# Allegro board MRHR_To_DAQ_Connect.brd
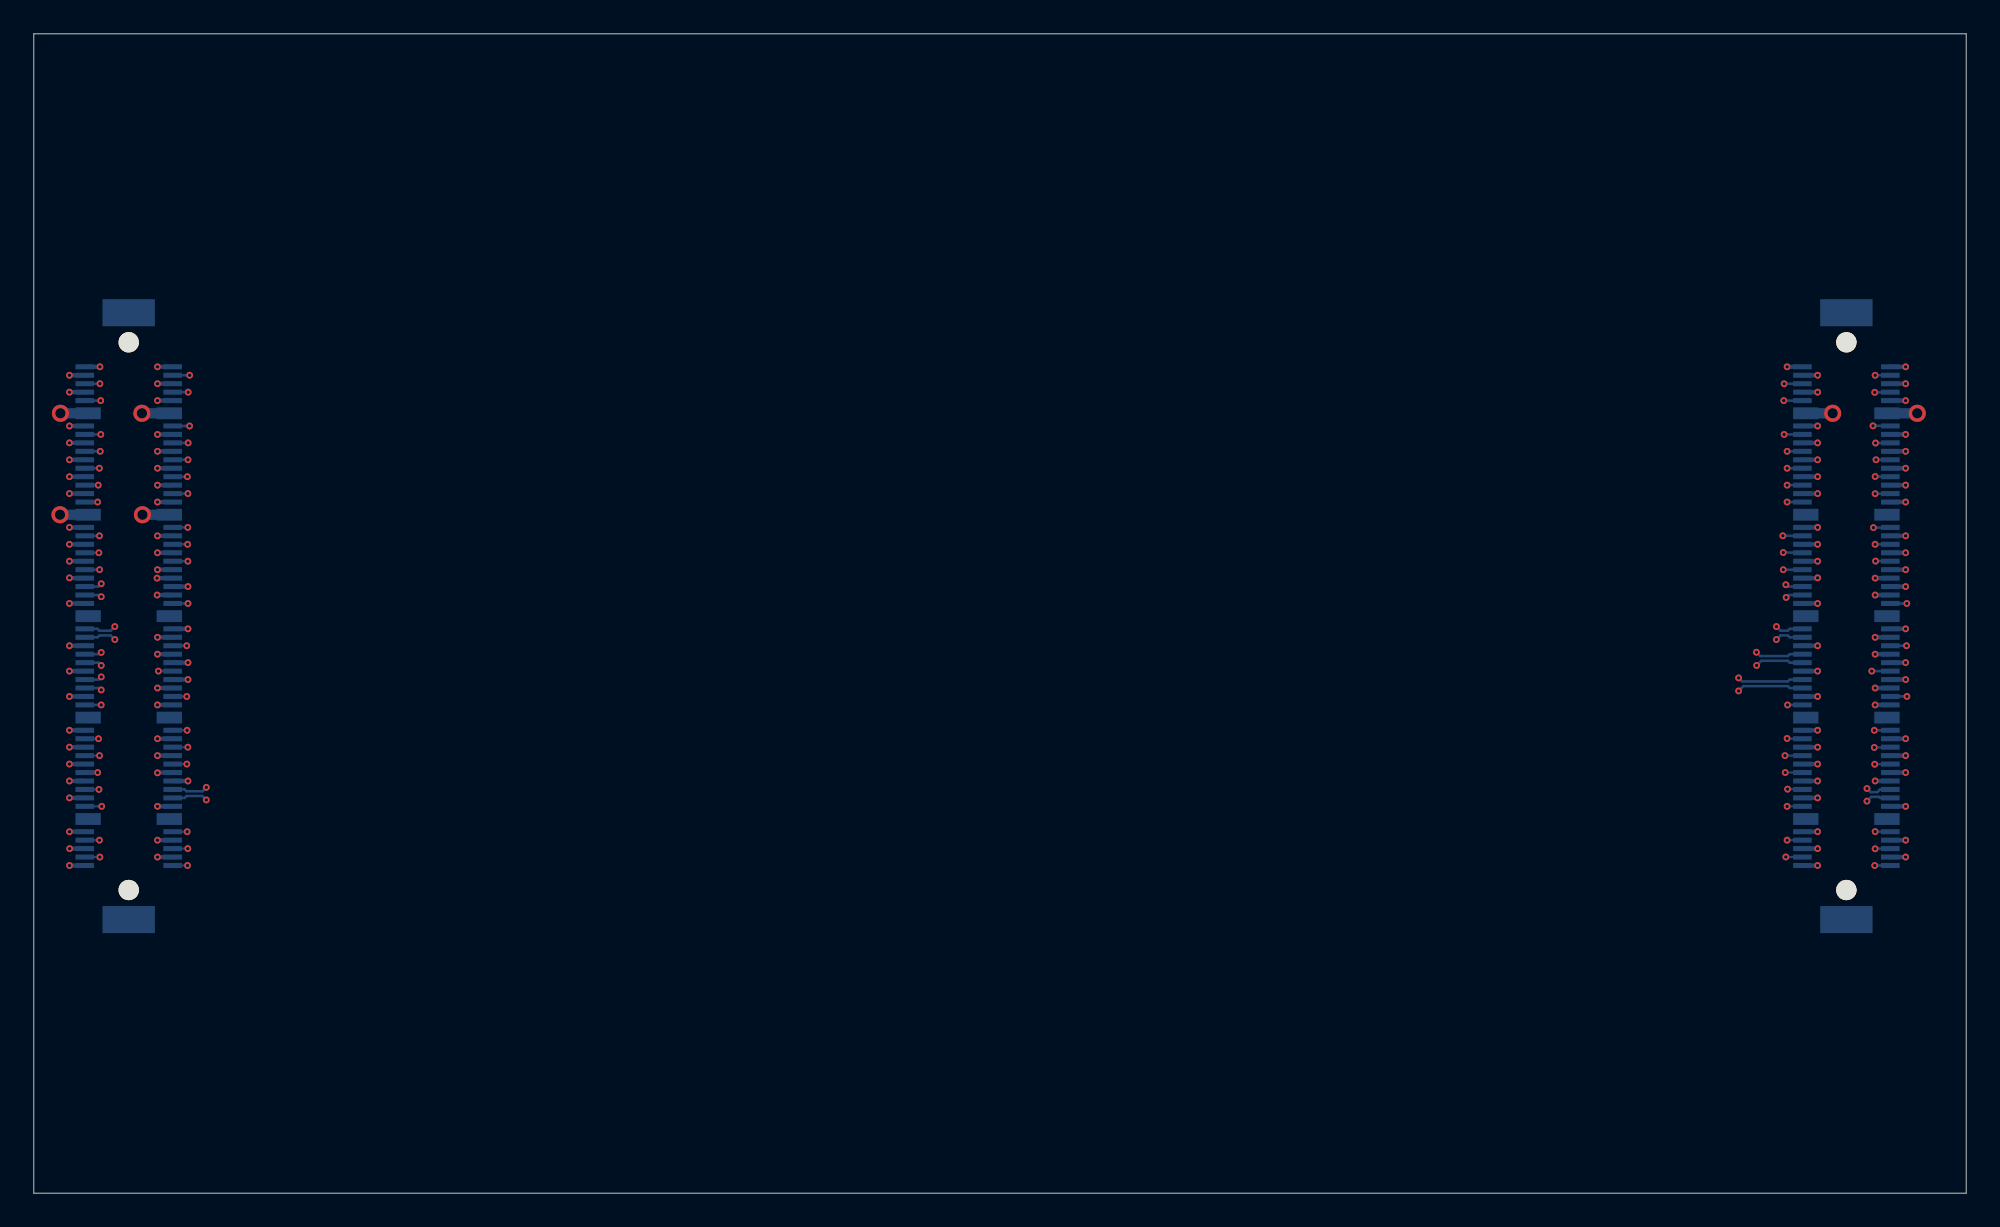
[diagram p0: board, top side]
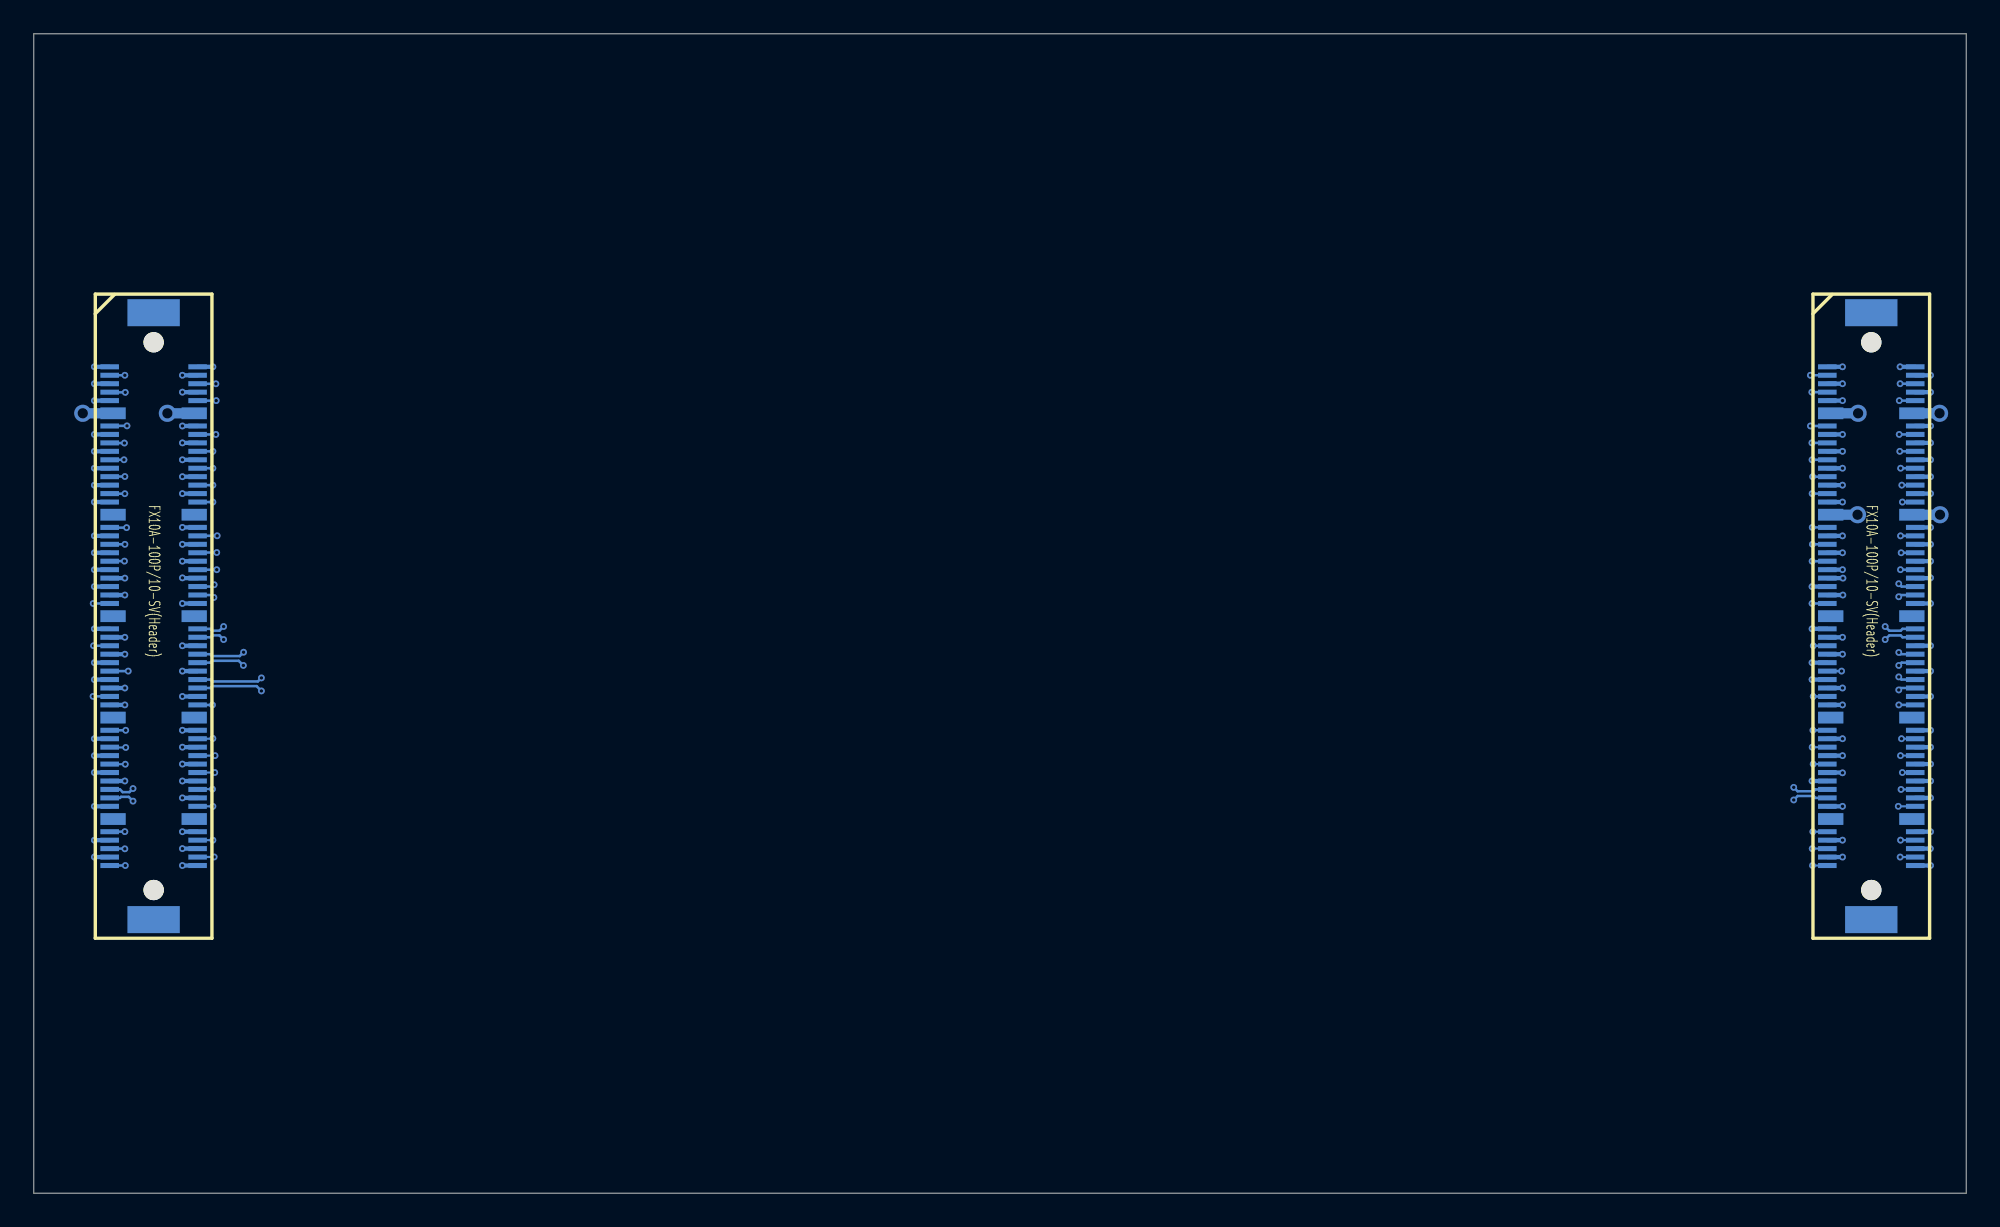
[diagram p1: board, bottom side, seen from below]

Outline 114.3 x 68.58 mm; copper layers: TOP, SIG1, SIG2, BOTTOM. Coordinates in mm from the lower left corner of the outline.
Outline path: 0,68.58 0,0 114.3,0 114.3,68.58 0,68.58

## Design rules (mm)
net group CK_5: nets CK_5N CK_5P
net group CK_40: nets CK_40N CK_40P
net group RAZ_CHN: nets RAZ_CHNN RAZ_CHNP
net group SPARE_DIFF: nets SPARE2 SPARE3
net group VAL_EVT: nets VAL_EVTN VAL_EVTP

## Placement (name value [footprint] x y rotation side)
U1  FX10A-100P_10-SV**(Header)  [FX10A-100P10-SV-HEADER]  8.76 52.88 270 bottom
U2  FX10A-100P_10-SV**(Header)  [FX10A-100P10-SV-HEADER]  110.36 52.88 270 bottom

## Library data of the parts
U1 U2 = FX10A_100P_10_SV_Header_1

## Footprints (pads in the part's own frame, mm; a bottom-side part is the same pattern mirrored in y, then rotated)
FX10A-100P10-SV-HEADER
  round 1.2 hole 1.2 unplated: (2.55,3.15) (34.95,3.15)
  rect 0.3x1.1 smd: 1(4,5.75) 2(4,0.55) 3(4.5,5.75) 4(4.5,0.55) 5(5,5.75) 6(5,0.55) 7(5.5,5.75) 8(5.5,0.55) 9(6,5.75) 10(6,0.55) 13(7.5,5.75) 14(7.5,0.55) 15(8,5.75) 16(8,0.55) 17(8.5,5.75) 18(8.5,0.55) 19(9,5.75) 20(9,0.55) 21(9.5,5.75) 22(9.5,0.55) 23(10,5.75) 24(10,0.55) 25(10.5,5.75) 26(10.5,0.55) 27(11,5.75) 28(11,0.55) 29(11.5,5.75) 30(11.5,0.55) 31(12,5.75) 32(12,0.55) 35(13.5,5.75) 36(13.5,0.55) 37(14,5.75) 38(14,0.55) 39(14.5,5.75) 40(14.5,0.55) 41(15,5.75) 42(15,0.55) 43(15.5,5.75) 44(15.5,0.55) 45(16,5.75) 46(16,0.55) 47(16.5,5.75) 48(16.5,0.55) 49(17,5.75) 50(17,0.55) 51(17.5,5.75) 52(17.5,0.55) 53(18,5.75) 54(18,0.55) 57(19.5,5.75) 58(19.5,0.55) 59(20,5.75) 60(20,0.55) 61(20.5,5.75) 62(20.5,0.55) 63(21,5.75) 64(21,0.55) 65(21.5,5.75) 66(21.5,0.55) 67(22,5.75) 68(22,0.55) 69(22.5,5.75) 70(22.5,0.55) 71(23,5.75) 72(23,0.55) 73(23.5,5.75) 74(23.5,0.55) 75(24,5.75) 76(24,0.55) 79(25.5,5.75) 80(25.5,0.55) 81(26,5.75) 82(26,0.55) 83(26.5,5.75) 84(26.5,0.55) 85(27,5.75) 86(27,0.55) 87(27.5,5.75) 88(27.5,0.55) 89(28,5.75) 90(28,0.55) 91(28.5,5.75) 92(28.5,0.55) 93(29,5.75) 94(29,0.55) 95(29.5,5.75) 96(29.5,0.55) 97(30,5.75) 98(30,0.55) 101(31.5,5.75) 102(31.5,0.55) 103(32,5.75) 104(32,0.55) 105(32.5,5.75) 106(32.5,0.55) 107(33,5.75) 108(33,0.55) 109(33.5,5.75) 110(33.5,0.55)
  rect 0.7x1.5 smd: 11(6.75,5.55) 12(6.75,0.75) 33(12.75,5.55) 34(12.75,0.75) 55(18.75,5.55) 56(18.75,0.75) 77(24.75,5.55) 78(24.75,0.75) 99(30.75,5.55) 100(30.75,0.75)
  rect 1.6x3.1 smd: B1(0.8,3.15) B2(36.7,3.15)

## Nets
GND: U1.2 U1.3 U1.6 U1.11(GND1) U1.12(GND1-1) U1.13 U1.16 U1.21 U1.24 U1.29 U1.32 U1.33(GND2) U1.34(GND2-2) U1.39 U1.42 U1.47 U1.50 U1.55(GND3) U1.56(GND3-3) U1.60 U1.61 U1.64 U1.70 U1.73 U1.76 U1.77(GND4) U1.78(GND4-4) U1.82 U1.83 U1.90 U1.91 U1.98 U1.99(GND5) U1.100(GND5-5) U1.101 U1.108 U1.109 U1.B1(PAD1) U1.B2(PAD2) U2.2 U2.3 U2.6 U2.11(GND1) U2.12(GND1-1) U2.13 U2.16 U2.21 U2.24 U2.29 U2.32 U2.33(GND2) U2.34(GND2-2) U2.39 U2.42 U2.47 U2.50 U2.55(GND3) U2.56(GND3-3) U2.60 U2.61 U2.64 U2.70 U2.73 U2.76 U2.77(GND4) U2.78(GND4-4) U2.82 U2.83 U2.90 U2.91 U2.98 U2.99(GND5) U2.100(GND5-5) U2.101 U2.108 U2.109 U2.B1(PAD1) U2.B2(PAD2)
VCC_CON_IN: U1.1 U1.7 U1.10 U1.17 U1.20 U1.25 U1.28 U1.35 U1.38 U1.43 U1.46 U1.48 U1.52 U1.53 U1.58 U1.66 U1.67 U1.72 U1.79 U1.86 U1.87 U1.92 U1.95 U1.104 U1.105 U2.1 U2.7 U2.10 U2.17 U2.20 U2.25 U2.28 U2.35 U2.38 U2.43 U2.46 U2.48 U2.52 U2.53 U2.58 U2.66 U2.67 U2.72 U2.79 U2.86 U2.87 U2.92 U2.95 U2.104 U2.105
A0: U1.14 U2.14
A1: U1.15 U2.15
CHIPSATB: U1.36 U2.36
CK_5N: U1.57 U2.57
CK_5P: U1.59 U2.59
CK_40N: U1.49 U2.49
CK_40P: U1.51 U2.51
DOUT1B: U1.44 U2.44
DOUT2B: U1.41 U2.41
END_READOUT1: U1.8 U2.8
END_READOUT2: U1.5 U2.5
HOLD: U1.18 U2.18
HOLDB: U1.88 U2.88
OUT_Q: U1.9 U2.9
OUT_TRIG0B: U1.81 U2.81
OUT_TRIG1B: U1.84 U2.84
OUT_TRIG2B: U1.85 U2.85
PWR_ON_A: U1.68 U2.68
PWR_ON_ADC: U1.74 U2.74
PWR_ON_D: U1.62 U2.62
PWR_ON_DAC: U1.75 U2.75
RAZ_CHNN: U1.63 U2.63
RAZ_CHNP: U1.65 U2.65
RESET_B: U1.45 U2.45
RST_COUNTERB: U1.31 U2.31
SELECT: U1.26 U2.26
SPARE0: U1.89 U2.89
SPARE1: U1.93 U2.93
SPARE2: U1.94 U2.94
SPARE3: U1.96 U2.96
SPARE4: U1.97 U2.97
SPARE5: U1.102 U2.102
SPARE6: U1.103 U2.103
SPARE7: U1.106 U2.106
SPARE8: U1.107 U2.107
SPARE9: U1.110 U2.110
SR_CK: U1.22 U2.22
SR_IN: U1.19 U2.19
SR_OUT: U1.4 U2.4
SR_RSTB: U1.23 U2.23
START_ACQ: U1.54 U2.54
START_READOUT1: U1.30 U2.30
START_READOUT2: U1.27 U2.27
TRANSMITON1B: U1.40 U2.40
TRANSMITON2B: U1.37 U2.37
TRIG_EXT: U1.80 U2.80
VAL_EVTN: U1.69 U2.69
VAL_EVTP: U1.71 U2.71

## Via types
v1: diameter 0.406, hole 0.203, TOP to BOTTOM, 200 vias
v2: diameter 1.016, hole 0.61, TOP to BOTTOM, 6 vias

## Routing (per net, layer and track width the routed paths; a pad name or vN(x,y) marks a point on that pad's centre or on a via; arc(x,y) is an arc through that point)
GND: length 58.6
  BOTTOM w0.254: U1.61 v1(2.11,32.38) ; U2.108 v1(110.72,19.88) ; U1.3 v1(2.11,48.38) ; U2.101 v1(105.51,21.38) ; U2.2 v1(110.72,48.88) ; U2.3 v1(105.51,48.38) ; U2.91 v1(105.51,24.38) ; U1.108 v1(7.32,19.88) ; U1.29 v1(2.11,41.38) ; U1.39 v1(2.11,38.38) ; U1.32 v1(7.32,40.88) ; v1(7.32,24.87) 7.33,24.88 U1.90 ; U1.70 v1(9.12,30.38) ; U2.13 v1(105.51,45.38) ; v1(105.51,36.4) 105.5,36.38 U2.47 ; U2.73 v1(105.51,29.38) ; U2.39 v1(105.51,38.38) ; v1(2.11,36.4) 2.12,36.38 U1.47 ; U1.50 v1(9.12,35.88) ; U1.60 v1(7.32,32.88) ; U1.2 v1(7.32,48.88) ; U2.50 v1(110.72,35.88) ; U2.83 v1(105.51,26.38) ; U2.21 v1(105.51,43.38) ; U2.61 v1(105.51,32.38) ; U1.98 v1(7.32,22.88) ; U2.32 v1(110.72,40.88) ; U2.29 v1(105.51,41.38) ; U1.73 v1(2.11,29.38) ; U2.60 v1(108.92,32.88) ; U2.76 v1(108.92,28.88) ; U2.64 v1(108.92,31.88) ; U1.16 v1(7.32,44.88) ; U1.83 v1(2.11,26.38) ; U2.6 v1(110.72,47.88) ; U2.70 v1(110.72,30.38) ; U1.64 v1(7.32,31.88) ; U1.76 v1(7.32,28.88) ; U2.98 v1(110.72,22.88) ; U1.6 v1(7.32,47.88) ; U2.90 v1(110.72,24.88) ; U1.101 v1(2.11,21.38) ; U2.42 v1(110.72,37.88) ; U2.16 v1(110.72,44.88) ; U1.21 v1(2.11,43.38) ; U2.82 v1(110.72,26.88) ; U1.82 v1(7.32,26.88) ; U1.109 v1(2.11,19.38) ; U1.91 v1(2.11,24.38) ; U2.109 v1(105.51,19.38) ; U1.13 v1(2.11,45.38) ; U1.24 v1(7.32,42.88) ; U2.24 v1(110.72,42.88) ; U1.42 v1(7.32,37.88)
  BOTTOM w0.61: U1.12 v2(6.39,46.13) ; U1.34 v2(6.43,40.13) ; U1.33 v2(1.55,40.13) ; U2.12 v2(111.4,46.13) ; U2.11 v2(106.4,46.13) ; U1.11 v2(1.57,46.13)
VCC_CON_IN: length 45.1
  BOTTOM w0.254: U2.28 v1(110.72,41.88) ; U2.72 v1(108.92,29.88) ; U1.79 v1(2.11,27.38) ; U2.35 v1(105.51,39.38) ; U2.20 v1(110.72,43.88) ; U1.28 v1(7.32,41.88) ; U1.38 v1(7.32,38.88) ; U1.53 v1(2.11,34.88) ; U1.48 v1(7.29,36.38) ; U1.52 v1(7.29,35.38) ; U2.86 v1(110.72,25.88) ; U1.25 v1(2.11,42.38) ; U1.87 v1(2.11,25.38) ; U2.1 v1(103.71,48.88) ; U1.35 v1(2.11,39.38) ; U1.46 v1(7.32,36.88) ; U2.7 v1(105.51,47.38) ; U2.79 v1(105.51,27.38) ; U1.1 v1(3.91,48.88) ; U2.92 v1(108.92,24.38) ; U1.7 v1(2.11,47.38) ; U1.20 v1(7.32,43.88) ; U1.92 v1(9.12,24.38) ; U1.66 v1(9.12,31.38) ; U2.58 v1(110.72,33.38) ; U2.66 v1(110.72,31.38) ; U2.43 v1(105.51,37.38) ; U1.86 v1(7.32,25.88) ; U2.52 v1(108.92,35.38) ; U1.58 v1(9.12,33.38) ; U2.87 v1(105.51,25.38) ; U2.48 v1(108.92,36.38) ; U2.53 v1(105.51,34.88) ; U1.67 v1(2.11,30.88) ; U2.95 v1(105.51,23.38) ; U1.105 v1(2.12,20.38) ; U1.10 v1(7.32,46.88) ; U2.46 v1(110.72,36.88) ; U2.105 v1(105.51,20.38) ; U1.72 v1(7.32,29.88) ; U2.10 v1(110.72,46.88) ; U1.17 v1(2.11,44.38) ; U2.25 v1(105.51,42.38) ; U1.95 v1(2.11,23.38) ; U2.67 v1(105.51,30.88) ; U2.17 v1(105.51,44.38) ; U2.104 v1(110.72,20.88) ; U1.104 v1(7.32,20.88) ; U2.38 v1(110.72,38.88) ; U1.43 v1(2.11,37.38)
A0: length 102
  SIG1 w0.152: v1(108.79,45.39) 108.31,44.91 105.08,44.91 104.6,45.38 v1(9.21,45.38)
  BOTTOM w0.152: v1(108.79,45.39) 109.81,45.39 U2.14 ; U1.14 v1(9.21,45.38)
A1: length 102
  SIG2 w0.152: v1(3.96,44.88) 4.47,45.39 7.93,45.39 8.43,44.88 v1(103.53,44.88)
  BOTTOM w0.152: U1.15 v1(3.96,44.88) ; v1(103.53,44.88) U2.15
CHIPSATB: length 102
  SIG1 w0.152: v1(9.11,39.38) 104.38,39.38 104.9,38.86 108.31,38.86 v1(108.81,39.37)
  BOTTOM w0.152: U2.36 109.8,39.37 v1(108.81,39.37) ; U1.36 v1(9.11,39.38)
CK_5N: length 102.8
  SIG2 w0.152: v1(4.79,33.52) 5.04,33.27 6.44,33.27 7.25,34.09 100.33,34.09 101.14,33.27 102.83,33.27 v1(103.07,33.52)
  BOTTOM w0.152: v1(103.07,33.52) 103.32,33.27 103.75,33.27 103.86,33.38 U2.57 ; v1(4.79,33.52) 4.55,33.27 3.87,33.27 3.76,33.38 U1.57
CK_5P: length 102.8
  SIG2 w0.152: v1(4.79,32.75) 5.04,32.99 6.55,32.99 7.37,33.81 100.21,33.81 101.03,32.99 102.83,32.99 v1(103.07,32.75)
  BOTTOM w0.152: v1(4.79,32.75) 4.55,32.99 3.87,32.99 3.76,32.88 U1.59 ; v1(103.07,32.75) 103.32,32.99 103.75,32.99 103.86,32.88 U2.59
CK_40N: length 103.1
  SIG1 w0.152: v1(103.63,35.99) 103.4,35.76 20.98,35.76 19.53,34.32 7.67,34.32 6.2,35.79 4.25,35.79 v1(3.99,36.05)
  BOTTOM w0.152: v1(3.99,36.05) 3.82,35.88 U1.49 ; U2.49 103.74,35.88 v1(103.63,35.99)
CK_40P: length 103.1
  SIG1 w0.152: v1(103.65,35.24) 103.4,35.48 21.1,35.48 19.65,34.04 7.56,34.04 6.08,35.51 4.22,35.51 v1(3.99,35.28)
  BOTTOM w0.152: U1.51 3.89,35.38 v1(3.99,35.28) ; v1(103.65,35.24) 103.79,35.38 U2.51
DOUT1B: length 102
  SIG1 w0.152: v1(108.94,37.39) 108.41,36.86 105.46,36.86 104.93,37.38 v1(9.11,37.38)
  BOTTOM w0.152: U1.44 v1(9.11,37.38) ; v1(108.94,37.39) 109.81,37.39 U2.44
DOUT2B: length 101.9
  SIG2 w0.152: v1(3.85,37.88) 4.25,38.29 8.35,38.29 8.74,37.9 v1(103.48,37.9)
  BOTTOM w0.152: U2.41 104.6,37.9 v1(103.48,37.9) ; U1.41 v1(3.85,37.88)
END_READOUT1: length 102
  SIG1 w0.152: v1(108.89,47.37) 108.43,47.83 105.18,47.83 104.74,47.38 v1(9.13,47.38)
  BOTTOM w0.152: U2.8 109.8,47.37 v1(108.89,47.37) ; U1.8 v1(9.13,47.38)
END_READOUT2: length 102.1
  SIG2 w0.152: v1(3.91,47.88) 4.46,48.44 8.23,48.44 8.79,47.88 v1(103.53,47.88)
  BOTTOM w0.152: U2.5 104.61,47.88 v1(103.53,47.88) ; U1.5 v1(3.91,47.88)
HOLD: length 102
  SIG1 w0.152: v1(108.94,44.37) 108.41,43.84 105,43.84 104.46,44.38 v1(9.13,44.38)
  BOTTOM w0.152: U1.18 v1(9.13,44.38) ; U2.18 109.8,44.37 v1(108.94,44.37)
HOLDB: length 102
  SIG1 w0.152: v1(9.05,25.38) 104.63,25.38 105.13,25.88 108.38,25.88 v1(108.89,25.37)
  BOTTOM w0.127: v1(108.89,25.37) 109.8,25.37 U2.88 ; U1.88 v1(9.05,25.38)
OUT_Q: length 102.7
  SIG1 w0.152: v1(103.51,46.88) 102.78,46.15 9.19,46.15 7.92,47.42 4.5,47.42 v1(3.96,46.88)
  BOTTOM w0.152: v1(103.51,46.88) U2.9 ; U1.9 v1(3.96,46.88)
OUT_TRIG0B: length 102
  SIG1 w0.152: v1(103.71,26.9) 8.46,26.9 7.98,27.38 4.32,27.38 v1(3.83,26.88)
  BOTTOM w0.127: U1.81 v1(3.83,26.88) ; U2.81 103.72,26.88 v1(103.71,26.9)
OUT_TRIG1B: length 102
  SIG1 w0.152: v1(108.86,26.37) 108.36,26.87 105,26.87 104.51,26.38 v1(9.11,26.38)
  BOTTOM w0.127: v1(108.86,26.37) 109.8,26.37 U2.84 ; U1.84 v1(9.11,26.38)
OUT_TRIG2B: length 102
  SIG1 w0.152: v1(103.58,25.88) 8.66,25.88 8.15,26.39 4.39,26.39 v1(3.89,25.88)
  BOTTOM w0.127: U1.85 v1(3.89,25.88) ; v1(103.58,25.88) U2.85
PWR_ON_A: length 103.8
  SIG2 w0.152: v1(7.37,30.88) 7.78,30.88 7.86,30.96 101.37,30.96 101.96,30.38 108.21,30.38 v1(108.72,30.88)
  BOTTOM w0.152: v1(108.72,30.88) U2.68 ; U1.68 v1(7.37,30.88)
PWR_ON_ADC: length 106.1
  SIG1 w0.152: v1(9.05,29.38) 10.41,29.38 13.49,32.46 102.18,32.46 102.67,31.98 105.34,31.98 106.93,30.38 109.8,30.38 v1(110.79,29.39)
  BOTTOM w0.152: v1(110.79,29.39) 109.82,29.39 U2.74 ; U1.74 v1(9.05,29.38)
PWR_ON_D: length 104.4
  SIG1 w0.152: v1(110.77,32.38) 108.38,32.38 107.98,32.79 104.72,32.79 104.27,32.33 102.96,32.33 102.95,32.34 102.9,32.34 102.3,32.94 9.61,32.94 v1(9.04,32.38)
  BOTTOM w0.152: U1.62 v1(9.04,32.38) ; v1(110.77,32.38) U2.62
PWR_ON_DAC: length 103.2
  SIG2 w0.152: v1(3.98,28.88) 4.72,28.88 5.92,27.69 7.14,27.69 7.9,26.92 101.78,26.92 v1(103.73,28.88)
  BOTTOM w0.152: U1.75 v1(3.98,28.88) ; U2.75 104.61,28.88 v1(103.73,28.88)
RAZ_CHNN: length 105.4
  SIG1 w0.152: v1(3.99,31.99) 4.23,31.74 4.89,31.74 5.79,30.84 5.79,29.77 7.19,28.37 87.92,28.37 91.25,31.7 101.59,31.7 v1(101.89,32)
  BOTTOM w0.152: v1(3.99,31.99) 3.88,31.88 U1.63 ; v1(101.89,32) 102.12,31.77 103.75,31.77 103.86,31.88 U2.63
RAZ_CHNP: length 105.4
  SIG1 w0.152: v1(101.9,31.22) 101.7,31.42 91.36,31.42 88.04,28.09 7.07,28.09 5.51,29.65 5.51,30.72 4.77,31.46 4.23,31.46 v1(3.99,31.22)
  BOTTOM w0.152: U2.65 103.86,31.38 103.75,31.49 102.18,31.49 v1(101.9,31.22) ; v1(3.99,31.22) 3.82,31.38 U1.65
RESET_B: length 102
  SIG1 w0.152: v1(103.48,36.88) 8.59,36.88 8.05,37.41 4.42,37.41 v1(3.89,36.88)
  BOTTOM w0.152: U2.45 104.61,36.88 v1(103.48,36.88) ; U1.45 v1(3.89,36.88)
RST_COUNTERB: length 102.2
  SIG2 w0.152: v1(103.71,40.88) 103.42,40.6 8.81,40.6 8.05,41.35 4.24,41.35 v1(3.77,40.88)
  BOTTOM w0.152: U1.31 v1(3.77,40.88) ; v1(103.71,40.88) U2.31
SELECT: length 102
  SIG1 w0.152: v1(108.92,42.39) 108.41,41.88 104.85,41.88 104.35,42.38 v1(9.08,42.38)
  BOTTOM w0.152: U1.26 v1(9.08,42.38) ; U2.26 109.8,42.39 v1(108.92,42.39)
SPARE0: length 102
  SIG1 w0.152: v1(3.78,24.88) 4.29,25.4 8.15,25.4 8.67,24.88 v1(103.6,24.88)
  BOTTOM w0.127: U1.89 v1(3.78,24.88) ; v1(103.6,24.88) U2.89
SPARE1: length 102.1
  SIG1 w0.152: v1(103.73,23.9) 36.42,23.9 35.89,24.43 9.8,24.43 9.25,23.88 v1(3.85,23.88)
  BOTTOM w0.127: U2.93 104.59,23.9 v1(103.73,23.9) ; U1.93 v1(3.85,23.88)
SPARE2: length 103.3
  SIG1 w0.152: v1(10.2,24) 10.38,23.83 33.06,23.83 34.58,22.3 105.22,22.3 106.67,23.75 108.16,23.75 108.35,23.94 v1(108.43,23.94)
  BOTTOM w0.152: U1.94 8.92,23.88 9.03,23.77 9.97,23.77 v1(10.2,24) ; U2.94 109.2,23.88 109.04,23.72 108.64,23.72 v1(108.43,23.94)
SPARE3: length 103.3
  SIG1 w0.152: v1(108.43,23.19) 108.37,23.19 108.1,23.47 106.79,23.47 105.34,22.02 34.46,22.02 32.94,23.55 10.49,23.55 v1(10.2,23.26)
  BOTTOM w0.152: v1(10.2,23.26) 9.97,23.5 9.03,23.5 8.92,23.38 U1.96 ; v1(108.43,23.19) 108.69,23.44 109.14,23.44 109.21,23.38 U2.96
SPARE4: length 103
  SIG2 w0.152: v1(103.71,22.88) 99.49,22.88 97.84,24.54 10.03,24.54 9.4,23.9 5.03,23.9 v1(4.02,22.88)
  BOTTOM w0.127: U1.97 v1(4.02,22.88) ; v1(103.71,22.88) U2.97
SPARE5: length 102
  SIG2 w0.152: v1(108.92,21.39) 108.46,20.93 104.77,20.93 104.32,21.38 v1(9.07,21.38)
  BOTTOM w0.127: U1.102 v1(9.07,21.38)
  BOTTOM w0.152: U2.102 109.81,21.39 v1(108.92,21.39)
SPARE6: length 102
  SIG1 w0.152: v1(3.88,20.88) 4.39,21.39 7.75,21.39 8.25,20.88 v1(103.71,20.88)
  BOTTOM w0.127: U1.103 v1(3.88,20.88) ; v1(103.71,20.88) U2.103
SPARE7: length 102
  SIG2 w0.152: v1(9.11,20.38) 104.51,20.38 105.03,19.86 108.41,19.86 v1(108.92,20.37)
  BOTTOM w0.127: U1.106 v1(9.11,20.38)
  BOTTOM w0.152: U2.106 108.93,20.38 v1(108.92,20.37)
SPARE8: length 102.1
  SIG1 w0.152: v1(3.91,19.88) 4.47,20.45 7.8,20.45 8.36,19.89 v1(103.63,19.89)
  BOTTOM w0.127: U1.107 v1(3.91,19.88) ; v1(103.63,19.89) 104.61,19.89 U2.107
SPARE9: length 102
  SIG2 w0.152: v1(9.09,19.38) 9.53,18.95 108.45,18.95 v1(108.89,19.38)
  BOTTOM w0.127: U1.110 v1(9.09,19.38)
  BOTTOM w0.152: v1(108.89,19.38) U2.110
SR_CK: length 102
  SIG1 w0.152: v1(108.97,43.38) 108.53,42.95 104.8,42.95 104.37,43.38 v1(9.12,43.38)
  BOTTOM w0.152: v1(108.97,43.38) 109.81,43.38 U2.22 ; U1.22 v1(9.12,43.38)
SR_IN: length 102
  SIG2 w0.152: v1(3.93,43.88) 4.42,44.37 8,44.37 8.49,43.88 v1(103.71,43.88)
  BOTTOM w0.152: v1(103.71,43.88) U2.19 ; U1.19 v1(3.93,43.88)
SR_OUT: length 102
  SIG1 w0.152: v1(9.22,48.38) 104.31,48.38 104.8,48.87 108.43,48.87 v1(108.92,48.38)
  BOTTOM w0.152: v1(108.92,48.38) U2.4 ; U1.4 v1(9.22,48.38)
SR_RSTB: length 102
  SIG2 w0.152: v1(103.71,42.88) 8.43,42.88 8,43.31 4.3,43.31 v1(3.88,42.88)
  BOTTOM w0.152: v1(103.71,42.88) U2.23 ; U1.23 v1(3.88,42.88)
START_ACQ: length 105
  SIG1 w0.152: v1(9.12,34.88) 10.65,34.88 12.24,36.47 104.65,36.47 105.99,35.13 108.59,35.13 108.75,34.98 109.08,34.98 109.28,35.17 110.5,35.17 v1(110.79,34.88)
  BOTTOM w0.152: v1(110.79,34.88) U2.54 ; U1.54 v1(9.12,34.88)
START_READOUT1: length 102
  SIG1 w0.152: v1(108.92,41.38) 108.46,40.92 104.67,40.92 104.21,41.38 v1(9.11,41.38)
  BOTTOM w0.152: U1.30 v1(9.11,41.38) ; U2.30 109.81,41.38 v1(108.92,41.38)
START_READOUT2: length 102
  SIG2 w0.152: v1(3.81,41.88) 4.27,42.34 8.1,42.34 8.56,41.88 v1(103.71,41.88)
  BOTTOM w0.152: U1.27 v1(3.81,41.88) ; v1(103.71,41.88) U2.27
TRANSMITON1B: length 102.1
  SIG1 w0.152: v1(108.91,38.38) 108.35,37.82 105.05,37.82 104.49,38.38 v1(9.1,38.38)
  BOTTOM w0.152: U1.40 v1(9.1,38.38) ; v1(108.91,38.38) U2.40
TRANSMITON2B: length 101.9
  SIG2 w0.152: v1(3.88,38.88) 4.29,39.29 8.62,39.29 9.03,38.89 v1(103.45,38.89)
  BOTTOM w0.152: U1.37 v1(3.88,38.88) ; v1(103.45,38.89) 104.61,38.89 U2.37
TRIG_EXT: length 102.2
  SIG1 w0.152: v1(9.07,27.38) 102.87,27.38 103.63,28.14 108.1,28.14 v1(108.86,27.38)
  BOTTOM w0.152: U2.80 109.81,27.38 v1(108.86,27.38) ; U1.80 v1(9.07,27.38)
VAL_EVTN: length 103.5
  SIG2 w0.152: v1(3.99,30.54) 4.22,30.3 5.24,30.3 6.1,29.44 6.12,29.44 7.14,28.42 15.28,28.42 17.08,30.23 100.58,30.23 v1(100.84,30.48)
  BOTTOM w0.152: U2.69 103.86,30.38 103.75,30.27 101.05,30.27 v1(100.84,30.48) ; U1.69 3.83,30.38 v1(3.99,30.54)
VAL_EVTP: length 103.5
  SIG2 w0.152: v1(100.84,29.71) 100.6,29.95 17.2,29.95 15.39,28.14 7.02,28.14 6.01,29.16 5.98,29.16 5.12,30.02 4.24,30.02 v1(3.99,29.77)
  BOTTOM w0.152: v1(3.99,29.77) 3.87,29.88 U1.71 ; U2.71 103.86,29.88 103.75,29.99 101.12,29.99 v1(100.84,29.71)
